# Altium PCB 5Vor3.3V.PcbDoc
Units mm, origin at the board's own origin, x right, y up, seen from the top; angles counter-clockwise.
Board outline 39.22 x 54.46 mm, 2 copper layers (Top Layer, Bottom Layer); 13 components, 7 nets, 32 pads, 6 vias.
Unrouted connection lines stored in the file: 10.
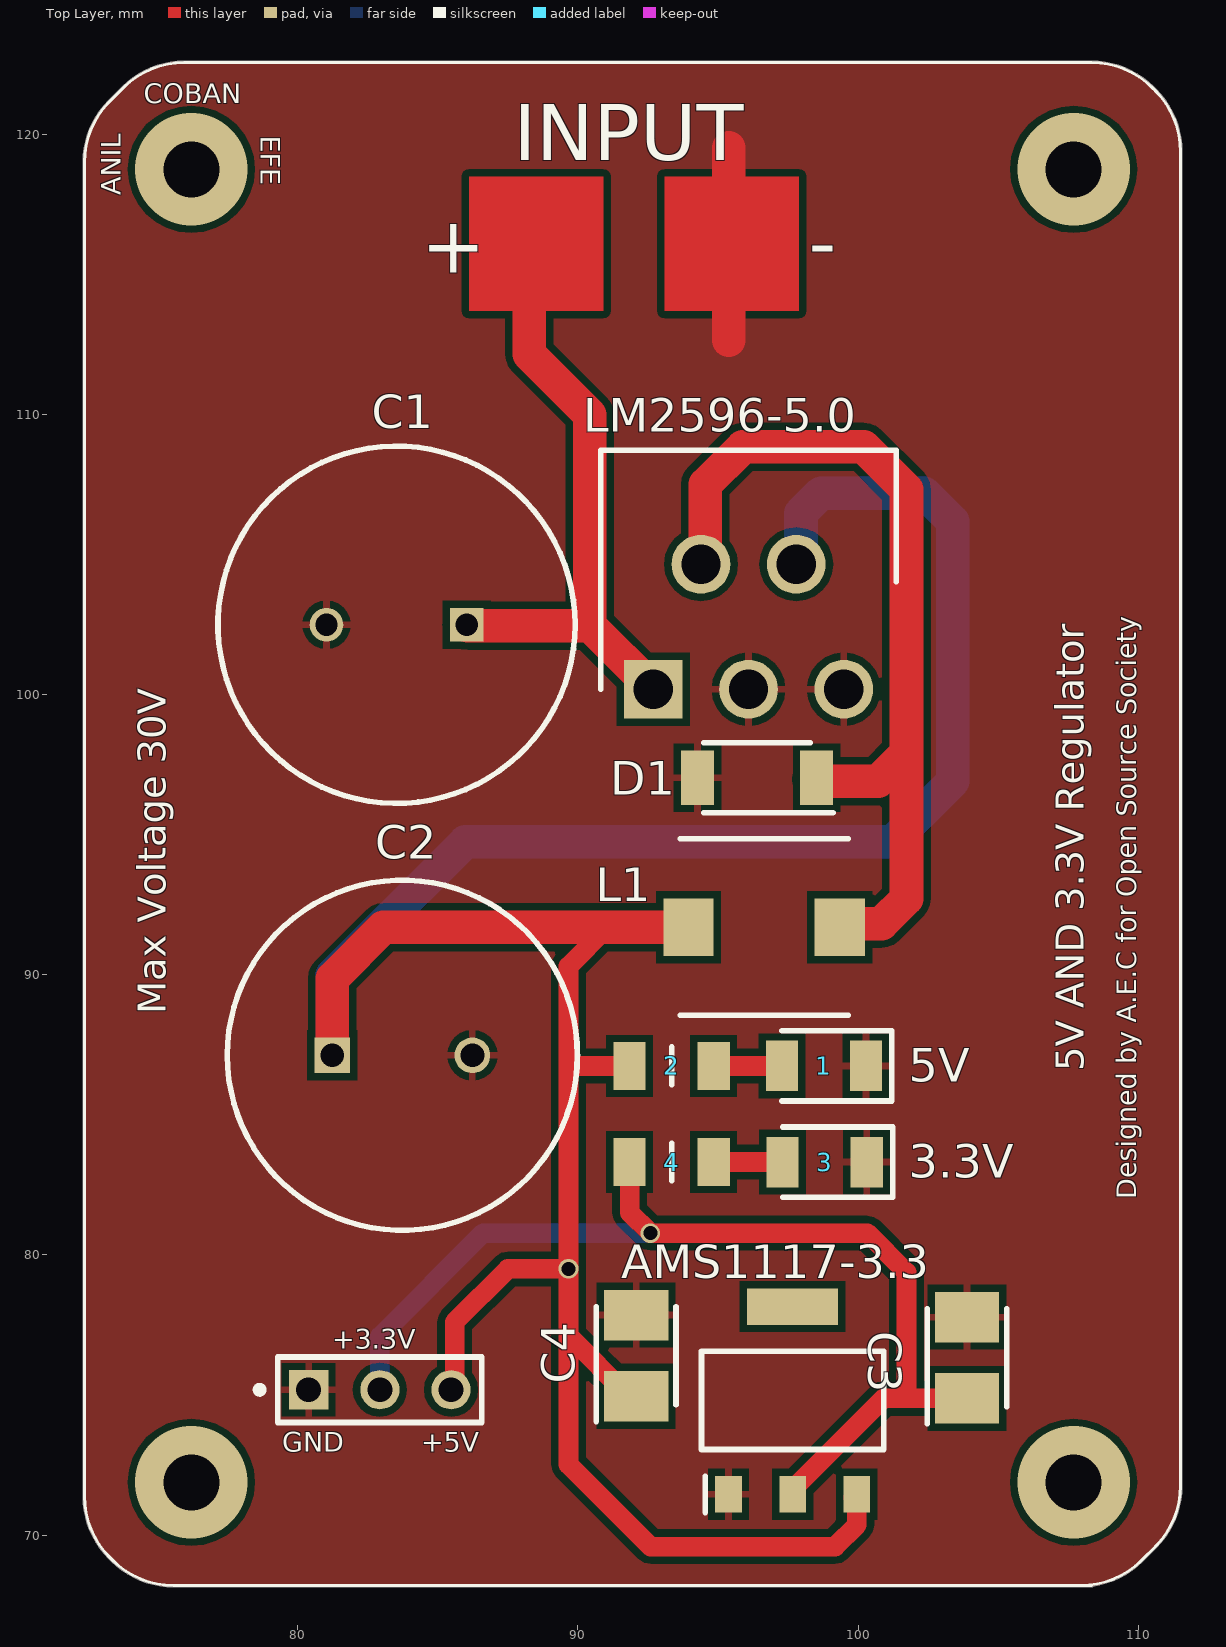
[diagram p0: Top Layer view]
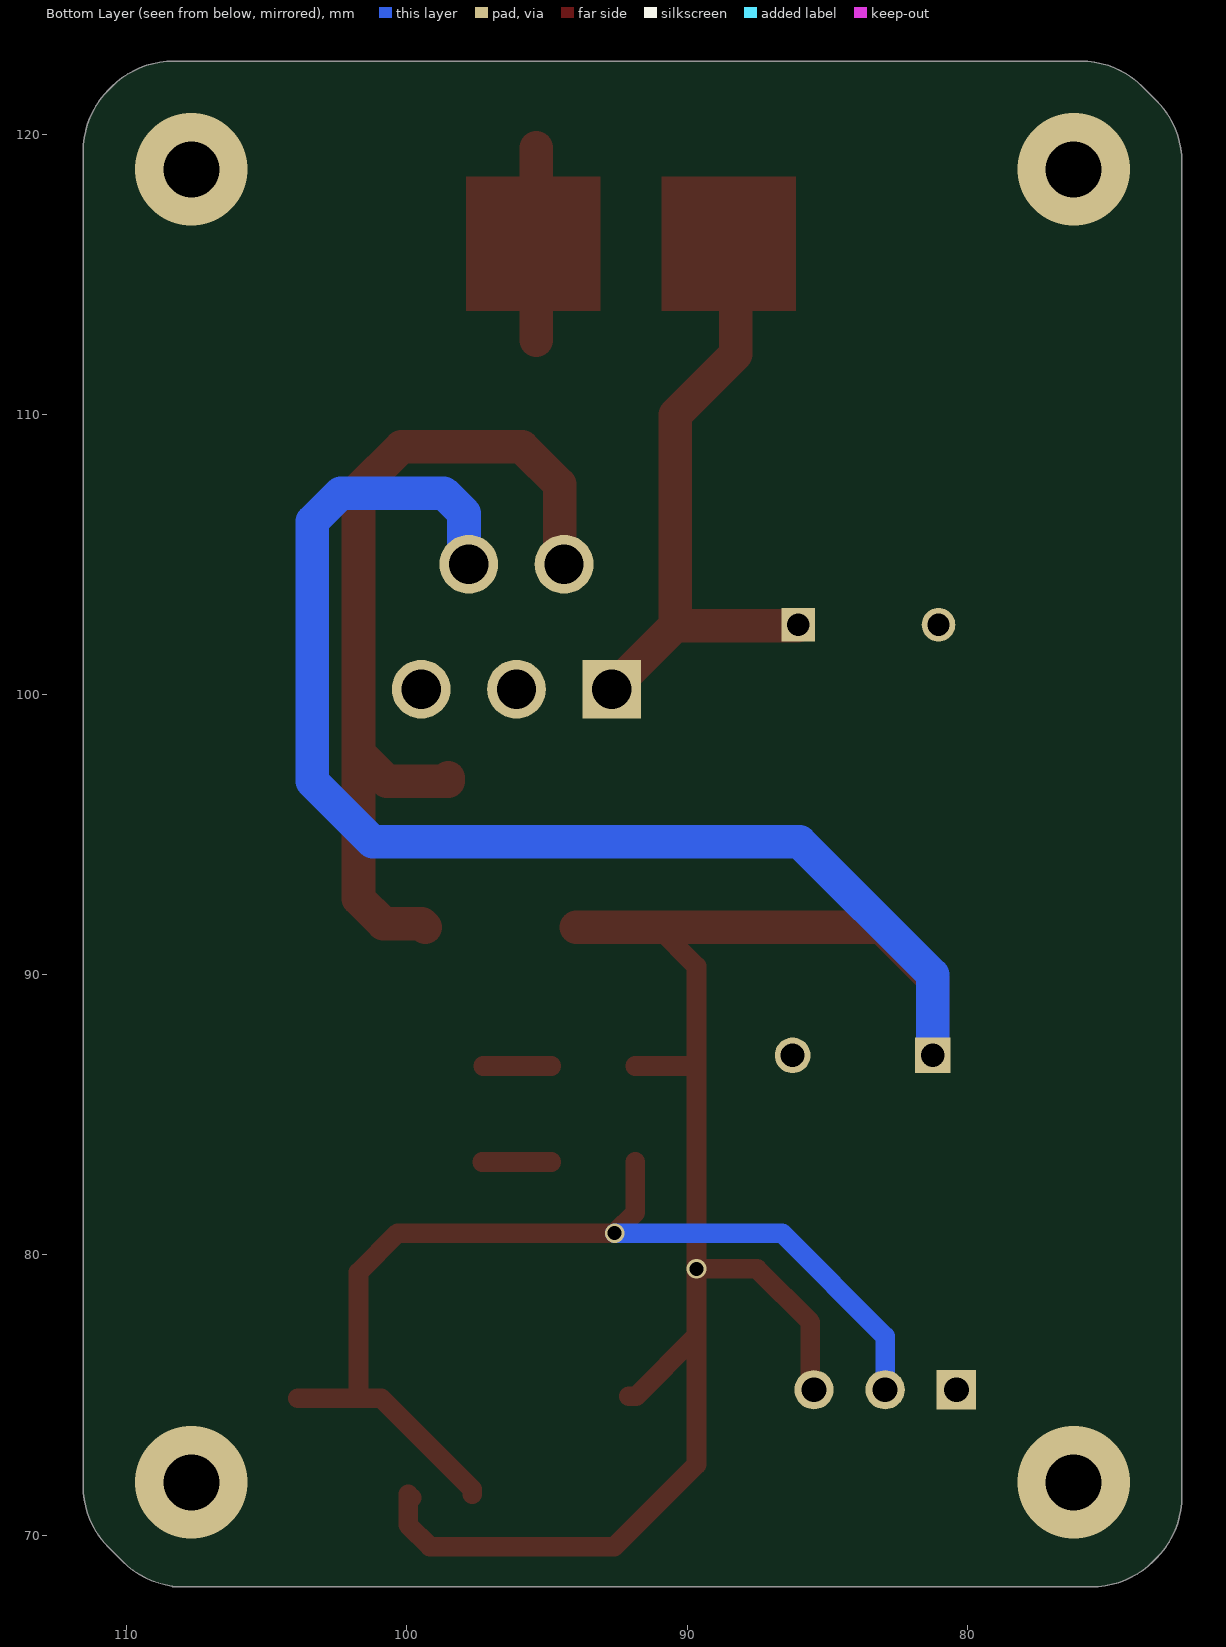
[diagram p1: Bottom Layer view, seen from below]
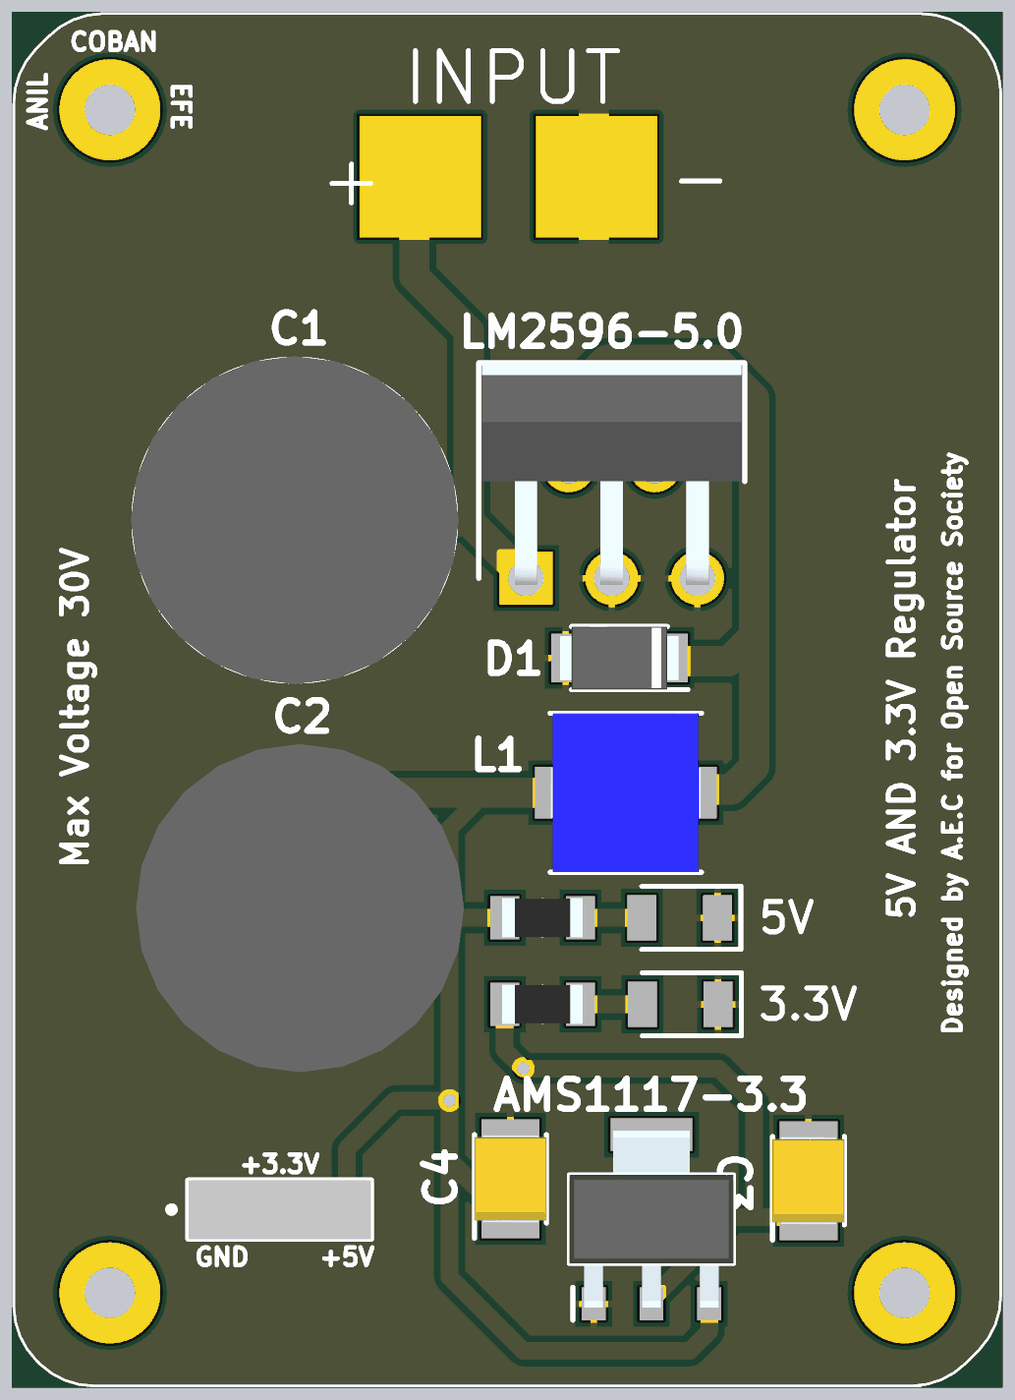
[diagram p2: 3D render of the assembled board from above, using the file's embedded part models]

## Layer stack, top to bottom
Top Solder: solder mask 0.0102, Solder Resist, Dk 3.5
Top Layer: signal copper 0.0356
Dielectric 1: dielectric 0.32, FR-4, Dk 4.8
Bottom Layer: signal copper 0.0356
Bottom Solder: solder mask 0.0102, Solder Resist, Dk 3.5

## Board outline
73.361,69.062 ccw(c73.397,69.097) 73.361,69.061 ccw(c75.565,71.265) 75.565,68.149 108.331,68.149 ccw(c108.331,68.199) 108.377,68.178 ccw(c107.95,71.265) 110.154,69.061 110.644,69.551 ccw(c108.44,71.755) 111.556,71.755 111.556,119.38 ccw(c108.44,119.38) 110.644,121.584 ccw(c110.608,121.548) 110.643,121.584 110.644,121.584 110.535,121.693 ccw(c108.331,119.489) 108.331,122.605 75.946,122.605 ccw(c75.946,119.489) 73.742,121.693 73.252,121.203 cw(c73.288,121.167) 73.253,121.203 73.252,121.203 ccw(c75.456,118.999) 72.34,118.999 72.34,71.374 ccw(c75.456,71.374) 73.252,69.17 73.361,69.061 73.253,69.17 cw(c73.288,69.206)

## Design rules (kind name [scope] priority, off if disabled: settings)
Clearance [All] p1: gap=0.254 ignorepadtopadclearanceinfootprint=FALSE except(0: Arc-Hole Track-Hole SMDPad-Hole THPad-Hole Via-Hole Fill-Hole Poly-Hole Region-Hole Text-Hole)
PolygonConnect [All] p1: connectstyle=Relief reliefconductorwidth=0.254 reliefentries=4 polygonreliefangle="90 Angle" airgapwidth=0.254
RoomDefinition Sheet1 [InComponentClass('Outside Board Components')] p1: confinementstyle=ConfineIn formatcopy=TRUE lockcomponents=FALSE outline 178.943,26.924 298.958,26.924 298.958,43.688 178.943,43.688
RoutingVias [All] p1: holewidth=0.711 width=1.27 viastyle="Through Hole" minholewidth=0.711 minwidth=1.27 maxholewidth=0.711 maxwidth=1.27
SolderMaskExpansion [All] p1: expansion=0.102 istentingtop=FALSE
Width [All] p1: maxlimit=12 minlimit=0.254 preferedwidth=0.254 minimp=50.000000 maximp=50.000000 favimp=50.000000
30 further rules are at their usual default settings.

## Classes and differential pairs
component class Sheet1: 1 1.2 2 3 4 AMS1117-3.3 C1 C2 C3 C4 D1 LM2596-5.0

## Components (designator, comment, footprint, x,y, rotation, side; value= is the part's Value field where it differs from the comment)
1 "LED2_1206" LEDC3216X130N 98.782,86.741 r180 top
2 "220ohm" RESC3216X70N 93.345,86.741 r0 top
3 "LED1_1206" LEDC3216X130N 98.806,83.312 r180 top
4 "120ohm" RESC3216X70N 93.345,83.312 r180 top
AMS1117-3.3 "" SOT229P700X180-4N 97.663,74.803 r90 top (schematic designator IC_AMS1117-3.3)
C1 "" CAPPRD500W60D1275H2200 86.026,102.489 r180 top
C2 "" CAPPRD500W65D1250H2200 81.233,87.122 r0 top
C3 "C4_TANT10" CAPPM3528X210N 103.886,76.327 r90 top
C4 "C5_TANT10" CAPPM3528X210N 92.075,76.401 r90 top
D1 "" SODFL4725X110N 96.393,97.028 r180 top
L1 "33uH" INDPM6063X300N 96.647,91.694 r0 top
LM2596-5.0 "" TO170P470X1028X2142-5P 92.69,100.188 r0 top (schematic designator IC_LM2596-5.0)
? "Comment" TECO-87224-3_V 82.931,75.184 r0 top

## Footprints (in the part's own frame and the unit in brackets; to place one, negate y for a bottom-side part, rotate by r counter-clockwise, add the part's x,y. Pads: shape width x height; smd on the part's side, far side on the other; paste and mask are expansions set on the pad)
CAPPM3528X210N [mm]
  rect 1.8x2.3 smd: 1(-1.45,0) 2(1.45,0)
  silkscreen extent -2.35,-1.43 1.75,1.43, body extent -1.75,-1.43 1.75,1.43, height 2.1
CAPPRD500W60D1275H2200 [mm]
  rect 1.2x1.2 hole 0.8: 1(0,0)
  round 1.2 hole 0.8: 2(5,0)
  silkscreen extent -3.88,-6.37 8.87,6.37, body extent -4,-6.5 9,6.5, height 22
CAPPRD500W65D1250H2200 [mm]
  rect 1.275x1.275 hole 0.85: 1(0,0)
  round 1.275 hole 0.85: 2(5,0)
  silkscreen extent -3.75,-6.25 8.75,6.25, body extent -4,-6.5 9,6.5, height 22
INDPM6063X300N [mm]
  rect 1.8x2.05 smd: 1(-2.7,0) 2(2.7,0)
  silkscreen extent -3,-3.15 3,3.15, body extent -3,-3.15 3,3.15, height 3
LEDC3216X130N [mm]
  rect 1.15x1.8 smd: 1(-1.5,0) 2(1.5,0)
  silkscreen extent -2.42,-1.25 1.5,1.25
RESC3216X70N [mm]
  rect 1.15x1.7 smd: 1(-1.5,0) 2(1.5,0)
  silkscreen extent 0,-0.67 0,0.67, body extent -1.6,-0.77 1.6,0.77, height 0.7
SODFL4725X110N [mm]
  rect 1.17x1.93 smd: 1(-2.125,0) 2(2.125,0)
  silkscreen extent -2.71,-1.25 1.9,1.25, body extent -2.35,-1.25 2.35,1.25, height 1.1
SOT229P700X180-4N [mm]
  rect 1.3x0.95 smd: 1(-3.35,2.29) 2(-3.35,0) 3(-3.35,-2.29)
  rect 1.3x3.25 smd: 4(3.35,0)
  silkscreen extent -4,-3.25 1.75,3.25, body extent -3.5,-3.25 3.5,3.25, height 1.8
TECO-87224-3_V [mm] "THD, 3-Leads, Body 7.21x2.31mm, Pitch 2.54mm"
  rect 1.4x1.4 hole 0.889: 1(-2.54,0)
  round 1.4 hole 0.889: 2(0,0) 3(2.54,0)
  silkscreen extent -4.41,-1.17 3.64,1.17, body extent -3.61,-1.17 3.61,1.17, height 10.36
TO170P470X1028X2142-5P [mm]
  rect 2.1x2.1 hole 1.4: 1(0,0)
  round 2.1 hole 1.4: 2(1.7,4.46) 3(3.4,0) 4(5.1,4.46) 5(6.8,0)
  silkscreen extent -1.87,0 8.67,8.53, body extent -1.74,-0.24 8.54,8.53, height 20.67

## Part data
1 3: library part QTLP650C2TR, "LED", Manufacturer_Name=Everlight, Mouser Part Number=638-QTLP650C2, Datasheet Link=https://media.digikey.com/pdf/Data%20Sheets/Everlight%20PDFs/QTLP650(C,D)-2,3,4,7,B.pdf, Height=1.3mm, Manufacturer_Part_Number=QTLP650C2TR, Mouser Price/Stock=https://www.mouser.com/Search/Refine.aspx?Keyword=638-QTLP650C2
2 4: library part ERJ-U08F2200V, "Resistor", Manufacturer_Name=Panasonic, Mouser Part Number=667-ERJ-U08F2200V, Datasheet Link=http://uk.rs-online.com/web/p/products/1724351, Height=0.7mm, Manufacturer_Part_Number=ERJ-U08F2200V, Mouser Price/Stock=https://www.mouser.com/Search/Refine.aspx?Keyword=667-ERJ-U08F2200V
AMS1117-3.3: library part ams1117-3.3v, "Integrated Circuit", Manufacturer_Name="Advanced Monolithic Systems", Datasheet Link=http://www.advanced-monolithic.com/pdf/ds1117.pdf, Height=1.8mm, Manufacturer_Part_Number=ams1117-3.3v
C1: library part UPW1V681MHD, "Capacitor Polarised", Manufacturer_Name=Nichicon, Mouser Part Number=647-UPW1V681MHD, RS Part Number=7152776P, Allied Price/Stock=https://www.alliedelec.com/nichicon-upw1v681mhd/70187400/, Allied_Number=70187400, Datasheet Link=http://nichicon-us.com/english/products/pdfs/e-upw.pdf, Height=22mm, Manufacturer_Part_Number=UPW1V681MHD, Mouser Price/Stock=https://www.mouser.com/Search/Refine.aspx?Keyword=647-UPW1V681MHD, RS Price/Stock=http://uk.rs-online.com/web/p/products/7152776P
C2: library part EEU-FC1J221S, "Capacitor Polarised", Manufacturer_Name=Panasonic, Mouser Part Number=667-EEU-FC1J221S, Datasheet Link=http://uk.rs-online.com/web/p/products/6283835, Height=22mm, Manufacturer_Part_Number=EEU-FC1J221S, Mouser Price/Stock=https://www.mouser.com/Search/Refine.aspx?Keyword=667-EEU-FC1J221S
C3 C4: library part TAJB106M025RNJ, "Capacitor Polarised", Manufacturer_Name=AVX, Mouser Part Number=581-TAJB106M025RNJ, Datasheet Link=http://datasheets.avx.com/TAJ.pdf, Height=2.1mm, Manufacturer_Part_Number=TAJB106M025RNJ, Mouser Price/Stock=https://www.mouser.com/Search/Refine.aspx?Keyword=581-TAJB106M025RNJ
D1: library part VSS8D5M10-M3_H, "Schottky Diode", Manufacturer_Name=Vishay, Manufacturer_Part_Number=VSS8D5M10-M3/H, Mouser Part Number=78-VSS8D5M10-M3/H, Datasheet Link=https://componentsearchengine.com/Datasheets/1/VSS8D5M10-M3_H.pdf, Height=1.1mm, Mouser Price/Stock=https://www.mouser.com/Search/Refine.aspx?Keyword=78-VSS8D5M10-M3%2FH
L1: library part B82462G4333M000, "Inductor", Manufacturer_Name=EPCOS, Mouser Part Number=871-B82462G4333M, RS Part Number=4958161P, Datasheet Link=https://en.tdk.eu/inf/30/db/ind_2008/b82462g4.pdf, Height=3mm, Manufacturer_Part_Number=B82462G4333M000, Mouser Price/Stock=https://www.mouser.com/Search/Refine.aspx?Keyword=871-B82462G4333M, RS Price/Stock=http://uk.rs-online.com/web/p/products/4958161P
LM2596-5.0: library part LM2596T-5.0, "Integrated Circuit", Manufacturer_Name="Texas Instruments", Mouser Part Number=926-LM2596T-50, RS Part Number=3313242, Datasheet Link=http://www.ti.com/general/docs/lit/getliterature.tsp?genericPartNumber=lm2596&fileType=pdf, Height=4.7mm, Manufacturer_Part_Number=LM2596T-5.0, Mouser Price/Stock=https://www.mouser.com/Search/Refine.aspx?Keyword=926-LM2596T-50, RS Price/Stock=http://uk.rs-online.com/web/p/products/3313242

## Via types
v1: diameter 4, hole 2, Top Layer to Bottom Layer, 4 vias
v2: diameter 0.7, hole 0.5, Top Layer to Bottom Layer, 2 vias

## Nets (pads, with @x,y where several pads share a name; then routed paths per layer and width w, separated by ;. In a path a pad name is that pad's centre, name@x,y a point inside that pad or via, vN(x,y) a via of type N, cw(c..) or ccw(c..) an arc to the next point about the centre after c; other vN are vias at no path point)
5V: 2.1 ?.3 AMS1117-3.3.3 C2.1 C4.1 L1.1 LM2596-5.0.4 | length 107.1
  Top Layer w0.7: ?.3 85.598,75.311 85.598,77.597 87.503,79.502 v2(89.662,79.502) ; 91.059,91.694 89.662,90.297 89.662,86.741 ; 2.1 89.662,86.741 ; C4.1 91.825,74.951 89.662,77.114 ; AMS1117-3.3.3@99.828,71.328 AMS1117-3.3.3 99.953,70.362 99.176,69.585 92.594,69.585 89.662,72.517 89.662,77.114 ; 89.662,77.114 v2(89.662,79.502) ; v2(89.662,79.502) 89.662,86.741
  Top Layer w1.2: C2.1 81.233,89.869 83.058,91.694 91.059,91.694 L1.1
  Bottom Layer w1.2: C2.1 81.233,89.996 85.979,94.742 101.219,94.742 103.378,96.901 103.378,106.172 102.362,107.188 98.679,107.188 97.962,106.471 97.962,104.82 LM2596-5.0.4
12V: C1.1 LM2596-5.0.1 | length 22.1
  Top Layer w1.2: C1.1 86.061,102.454 90.424,102.454 ; 88.392,115.951 88.265,115.824 88.265,112.141 90.424,109.982 90.424,102.454 ; LM2596-5.0.1@92.71,100.208 LM2596-5.0.1 90.424,102.454
GND: 1.1 3.1 ?.1 AMS1117-3.3.1 C1.2 C2.2 C3.2 C4.2 D1.2 LM2596-5.0.3 LM2596-5.0.5 | length 6.9
  Top Layer w1.2: 95.377,112.649 95.377,119.507
Net1_2: 1.2 2.2 | length 2.4
  Top Layer w0.7: 2.2 1.2
Net3_2: 3.2 4.1 | length 2.5
  Top Layer w0.7: 4.1 3.2
NetD1_1: D1.1 L1.2 LM2596-5.0.2 | length 32.4
  Top Layer w1.2: LM2596-5.0.2 94.544,104.802 94.544,107.498 95.885,108.839 100.203,108.839 101.727,107.315 101.727,97.917 ; D1.1 98.518,96.916 98.533,96.901 100.711,96.901 101.727,97.917 ; L1.2 99.474,91.821 100.838,91.821 101.727,92.71 101.727,97.917
VCC: 4.2 ?.2 AMS1117-3.3.2 C3.1 | length 37.9
  Top Layer w0.7: 4.2 91.845,81.51 v2(92.583,80.772) 100.33,80.772 101.727,79.375 101.727,74.877 ; AMS1117-3.3.2 97.663,71.628 100.912,74.877 101.727,74.877 ; C3.1 101.727,74.877
  Bottom Layer w0.7: ?.2 82.931,77.089 86.614,80.772 v2(92.583,80.772)
pads on no net: AMS1117-3.3.4
copper on no net:
  other v1: 76.2,71.882 107.696,71.882 76.2,118.745 107.696,118.745

## Polygon pours and split planes (outlines as drawn)
GND on Top Layer "Top Layer-No Net" (solid, pour order 1): 73.361,69.062 ccw(c73.397,69.097) 73.361,69.061 ccw(c75.565,71.265) 75.565,68.149 108.331,68.149 ccw(c108.331,68.199) 108.377,68.178 ccw(c107.95,71.265) 110.154,69.061 110.644,69.551 ccw(c108.44,71.755) 111.556,71.755 111.556,119.38 ccw(c108.44,119.38) 110.644,121.584 ccw(c110.608,121.548) 110.643,121.584 110.644,121.584 110.535,121.693 ccw(c108.331,119.489) 108.331,122.605 75.946,122.605 ccw(c75.946,119.489) 73.742,121.693 73.252,121.203 cw(c73.288,121.167) 73.253,121.203 73.252,121.203 ccw(c75.456,118.999) 72.34,118.999 72.34,71.374 ccw(c75.456,71.374) 73.252,69.17 73.361,69.061 73.253,69.17 cw(c73.288,69.206)

## Other copper
Top Layer:
  rectangle net GND: 93.091,113.691 97.891,118.491
  rectangle net 12V: 86.106,113.691 90.906,118.491

## Silkscreen, mask and mechanical layers (free items; w line width, h text height)
Top Overlay:
  lines w0.1: 107.95,68.199 ccw(c107.95,71.265) 110.118,69.097 110.608,69.587 ccw(c108.44,71.755) 111.506,71.755 111.506,119.38 ccw(c108.44,119.38) 110.608,121.548 110.499,121.657 ; 108.331,68.199 75.565,68.199 ; 73.397,69.097 ccw(c75.565,71.265) 75.565,68.199 ; 73.397,69.097 ccw(c75.565,71.265) 75.565,68.199 ; 73.397,69.097 73.288,69.206 cw(c75.456,71.374) 72.39,71.374 72.39,118.999 cw(c75.456,118.999) 73.288,121.167 73.778,121.657 cw(c75.946,119.489) 75.946,122.555 108.331,122.555 ; 108.331,122.555 cw(c108.331,119.489) 110.499,121.657 ; 108.331,122.555 cw(c108.331,119.489) 110.499,121.657
  text "COBAN" at 74.495,121.104 h0.7
  text "EFE" at 78.686,119.942 h0.7 r270
  text "INPUT" at 87.703,119.072 h2
  text "ANIL" at 73.675,117.824 h0.7 r90
  text "-" at 98.244,115.151 h2
  text "+" at 84.401,115.056 h2
  text "Max Voltage 30V" at 75.286,88.592 h1 r90
  text "5V AND 3.3V Regulator" at 108.052,86.56 h1 r90
  text "5V" at 101.8,86.179 h1.2
  text "3.3V" at 101.8,82.75 h1.2
  text "Designed by A.E.C for Open Source Society" at 109.93,81.988 h0.7 r90
  text "+3.3V" at 81.226,76.654 h0.7
  text "GND" at 79.448,72.971 h0.7
  text "+5V" at 84.401,72.971 h0.7
Top Solder:
  rectangle: 92.972,113.593 97.972,118.593
  rectangle: 85.987,113.593 90.987,118.593